# Altium PCB Summits7Beta_PCB2.PcbDoc
Units mm, origin at the board's own origin, x right, y up, seen from the top; angles counter-clockwise.
Board outline 62.5 x 25 mm, 2 copper layers (Top Layer, Bottom Layer), stack 0.871 mm thick; 59 components, 43 nets, 196 pads, 159 vias.
Unrouted connection lines stored in the file: 108.
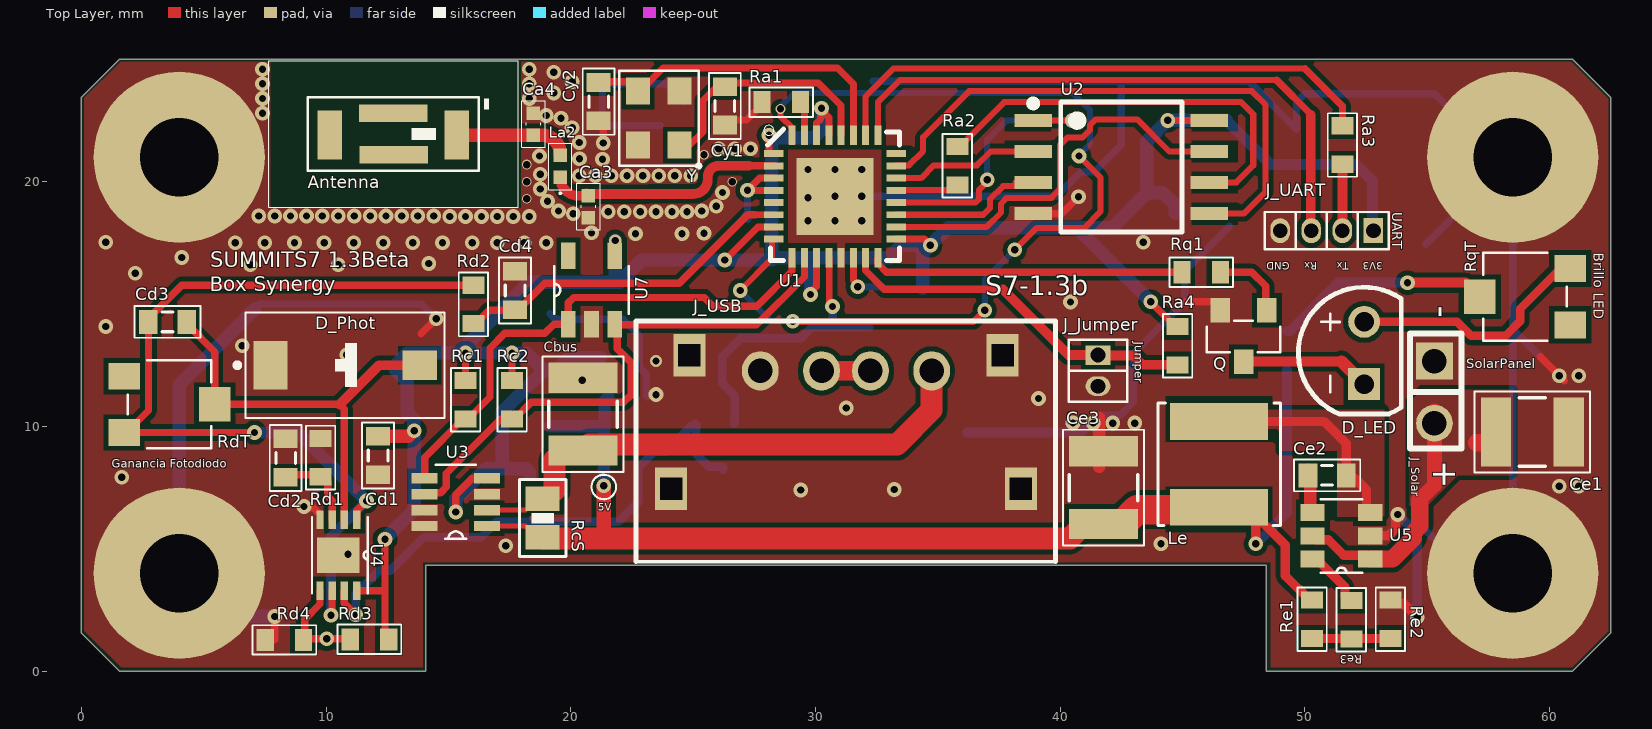
[diagram p0: Top Layer view]
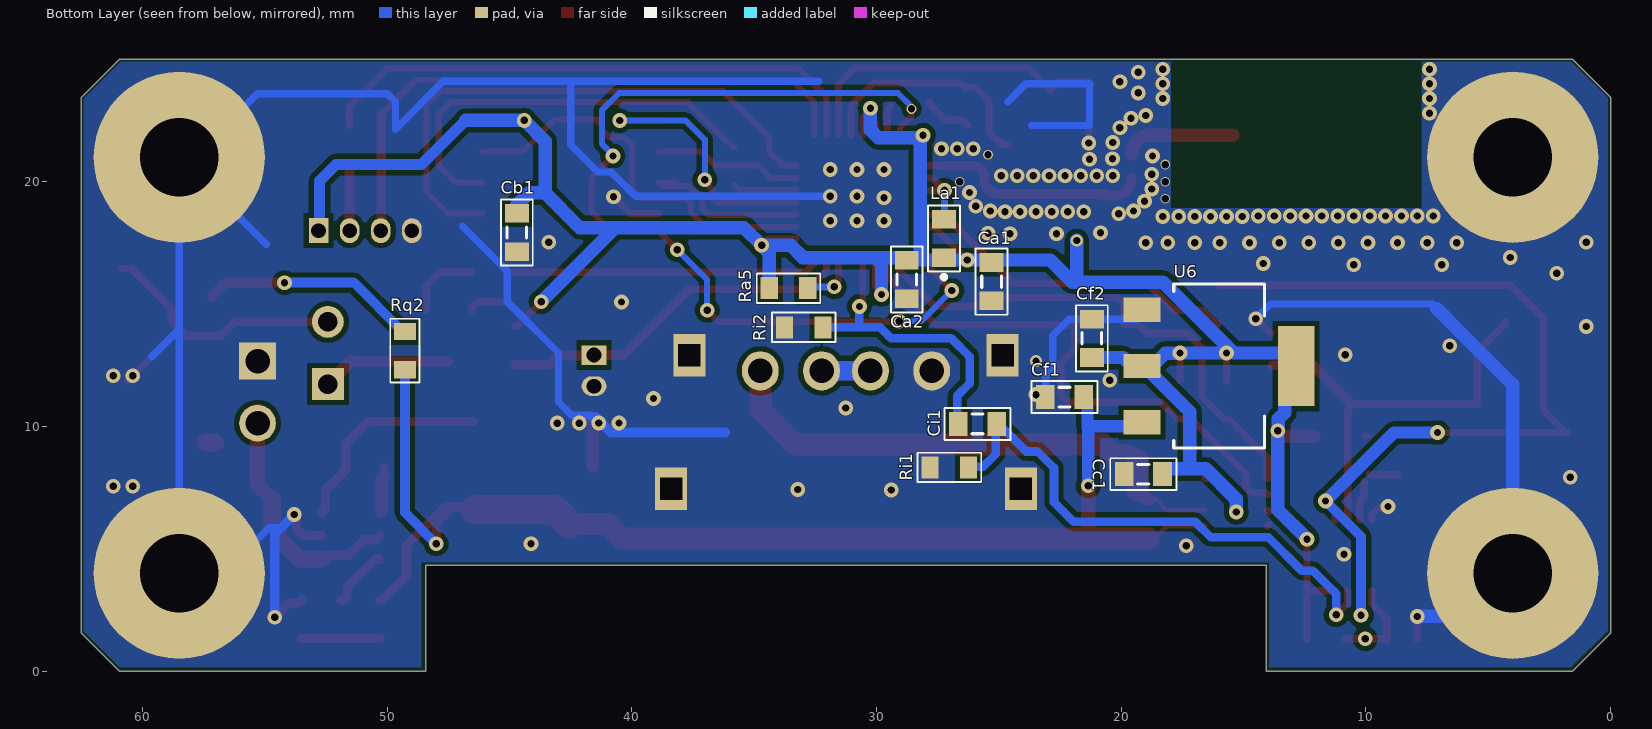
[diagram p1: Bottom Layer view, seen from below]

## Layer stack, top to bottom
Top Solder: solder mask 0.0102, Solder Resist, Dk 3.5
Top Layer: signal copper 0.0356
Dielectric 1: dielectric 0.8, FR-4, Dk 4.8
Bottom Layer: signal copper 0.0356
Bottom Solder: solder mask 0.0102, Solder Resist, Dk 3.5

## Board outline
62.5,1.55 60.95,0 48.425,0 48.425,4.325 14.075,4.325 14.075,0 1.55,0 0,1.55 0,23.45 1.55,25 60.95,25 62.5,23.45

## Design rules (kind name [scope] priority, off if disabled: settings)
Clearance [All] p1: gap=0.2 ignorepadtopadclearanceinfootprint=FALSE
ComponentClearance [All] p1: gap=0.099 collisioncheckmode=3 verticalgap=0.099 showdistances=FALSE
HoleSize [All] p1: absolutevalues=TRUE maxlimit=3.2 minlimit=0.025 maxpercent=80.000 minpercent=20.000
MinimumSolderMaskSliver [All] p1: minsoldermaskwidth=0.045
PlaneConnect [All] p1: planeconnectstyle=Direct reliefexpansion=0.508 reliefentries=4 reliefconductorwidth=0.254 reliefairgap=0.254
PolygonConnect [All] p1: connectstyle=Direct reliefconductorwidth=0.254 reliefentries=4 polygonreliefangle="90 Angle" airgapwidth=0.254
RoutingVias [All] p1: holewidth=0.3 width=0.6 viastyle="Through Hole" minholewidth=0.008 minwidth=0.5 maxholewidth=4 maxwidth=7.1
SilkToSilkClearance [All] p1: silktosilkclearance=0
SilkToSolderMaskClearance [IsPad] p1: minsilkscreentomaskgap=0.099 clearancetoexposedcopper=TRUE
SolderMaskExpansion [All] p1: expansion=0.102
Width [All] p1: maxlimit=1.2 minlimit=0.2 preferedwidth=0.2
24 further rules are at their usual default settings.

## Components (designator, comment, footprint, x,y, rotation, side; value= is the part's Value field where it differs from the comment)
Antenna "AntennaCeramic" ANTENNA_CERAMIC_SUMMITS 12.75,21.95 r0 top
Ca1 "10uF" CAP_0603 25.3,15.914 r270 bottom
Ca2 "100nF" CAP_0603 28.766,16 r270 bottom
Ca3 "3.0pF" CAP_0402 20.725,18.98 r270 top
Ca4 "2.4pF" CAP_0402 18.475,22.35 r90 top
Cb1 "4.7uF" CAP_0603 44.7,17.929 r270 bottom
Cbus "22uF" CAP_1210 20.5,10.5 r90 top
Cc1 "4.7uF" CAP_0603 19.1,8.05 r0 bottom
Cd1 "4.7uF" CAP_0603 12.125,8.813 r270 top
Cd2 "100pF" CAP_0603 8.35,8.713 r90 top
Cd3 "100pF" CAP_0603 3.515,14.27 r180 top
Cd4 "2.2uF" CAP_0603 17.725,15.555 r90 top
Ce1 "22uF" CAP_1210 59.3,9.77 r0 top
Ce2 "1uF" CAP_0603 50.915,8 r0 top
Ce3 "22uF" CAP_1210 41.775,7.499 r90 top
Cf1 "22uF" CAP_0603 22.315,11.2 r0 bottom
Cf2 "22uF" CAP_0603 21.2,13.6 r90 bottom
Ci1 "0.1uF" CAP_0603 25.875,10.1 r0 bottom
Cy1 "22pF" CAP_0603 26.3,23.1 r270 top
Cy2 "22pF" CAP_0603 21.14,23.27 r270 top
D_LED "OVLGC0C6B9" LED 52.425,13 r90 top locked
D_Phot "VBPW34S" BPW34S 10.775,12.5 r180 top locked
J_Jumper "M50-3530242" "JUMPER-1.27 MM" 41.55,12.28 r270 top
J_Solar "Connx2_Panel" PANEL_IN 55.3,11.4 r90 top
J_UART "M50-3530442" UART-1.27MM 50.9,18 r180 top
J_USB "CQ-USB-AFFS90" USB-A__IPX8 27.75,12.27 r0 top
La1 "4.3nH" IND_0603 27.221,17.7 r90 bottom
La2 "2.2nH" IND_0402 19.575,20.629 r90 top
Le "6.8uH 2.3A" INDUCTOR_SRN5040 46.5,8.45 r90 top
Q "ZXT11N20DF" TRANSISTOR_SOT23-3 47.5,13.7 r180 top
Ra1 "12K +- 1%" RES_0603 28.6,23.25 r180 top
Ra2 "200" RES_0603 35.8,20.65 r270 top
Ra3 "499" RES_0603 51.54,21.5 r90 top
Ra4 "1K" RES_0603 44.8,13.3 r270 top
Ra5 "5.6K" RES_0603 33.6,15.65 r180 bottom
Rc1 "10K" RES_0603 15.7,11.085 r270 top
Rc2 "10K" RES_0603 17.6,11.085 r270 top
RcS "0.01 Ohm 0.5W 1%" RES-SHUNT-0805 18.85,6.25 r90 top
Rd1 "1K" RES_0603 9.775,8.725 r270 top
Rd2 "6.8K" RES_0603 16.025,14.985 r90 top
Rd3 "22K" RES_0603 11.775,1.3 r180 top
Rd4 "2.2K" RES_0603 8.3,1.275 r0 top
RdT "R_Trimmer_20K" RES_TRIMMER 3.6,10.9 r270 top
Re1 "43.2K" RES_0603 50.3,2.115 r270 top
Re2 "7.68K" RES_0603 53.5,2.115 r90 top
Re3 "59K" RES_0603 51.9,2.1 r270 top
Ri1 "270" RES_0603 27.025,8.325 r180 bottom
Ri2 "270" RES_0603 32.975,14.05 r180 bottom
Rq1 "1K" RES_0603 45.765,16.3 r180 top
Rq2 "33" RES_0603 49.275,13.1 r90 bottom
RqT "R_Trimmer_1K" RES_TRIMMER 59,15.3 r90 top
U1 "ESP8266EX" ESP8266_QFN32-5X5MM 30.8,19.4 r0 top
U2 "W25Q32JVSSIQ" W25Q32JVSSIQ_SOIC127P790X216-8N 42.5,20.6 r0 top
U3 "INA219BIDCNR" "INA219B SOT23" 15.3,6.9 r180 top
U4 "MCP6002-E/MC" MCP6002-DFN8 10.5,4.738 r270 top
U5 "AP65111AWU-7" AP65111A-SOT23-6 51.5,5.525 r180 top
U6 "LT1117IST-3.3" LT1117IST-3.3_SOT-223 16,12.465 r180 bottom
U7 "EEPROM 128K" 24CW128 20.85,15.575 r90 top
Y "ABM8-26MHz" ABM8-26_OSCSC320X250X100N 23.604,22.6 r180 top

## Footprints (in the part's own frame and the unit in brackets; to place one, negate y for a bottom-side part, rotate by r counter-clockwise, add the part's x,y. Pads: shape width x height; smd on the part's side, far side on the other; paste and mask are expansions set on the pad)
24CW128 [mm] "Footprint EEPROM SOT23"
  rect 1.1x0.6 smd: 1(-1.4,0.95) 2(-1.4,0) 3(-1.4,-0.95) 4(1.4,-0.95) 5(1.4,0.95)
  silkscreen extent -0.97,-1.53 0.97,1.53, body extent -1.25,-1.5 1.25,1.5, height 1.11
ABM8-26_OSCSC320X250X100N [mm] "Crystal de 26MHz"
  rect 0.98x1.1 smd: 1(-0.85,1.1) 2(-0.85,-1.1) 3(0.85,-1.1) 4(0.85,1.1)
  silkscreen extent -1.71,-1.93 1.63,2.04, body extent -1.25,-1.6 1.25,1.6, height 2.63
ANTENNA_CERAMIC_SUMMITS [mm] "PCB CERAMIC ANTENNA"
  rect 1x2 smd: 1(2.6,-0.05) 2(-2.6,-0.05)
  rect 2.8x0.7 smd: 3(0,0.85) 4(0.025,-0.85)
  silkscreen extent -5.1,-3 5.1,3, body extent -2.5,-1 2.5,1, height 2.63
AP65111A-SOT23-6 [mm] "Footprint Buck"
  rect 1x0.7 smd: 1(-1.185,0.95) 2(-1.185,0) 3(-1.185,-0.95) 4(1.185,-0.95) 5(1.185,0) 6(1.185,0.95)
  silkscreen extent -0.85,-1.5 0.85,1.5, body extent -1.4,-1.45 1.4,1.45, height 1.45
BPW34S [mm] "Footprint Fotodiodo"
  rect 1.4x1.2 smd paste-2 mask+0: A(-3.05,0)
  rect 1.4x2 smd paste-2 mask+0: C(3.05,0)
  silkscreen extent -4.06,-2.16 4.5,2.16, body extent -3.2,-1.95 3.2,1.95, height 1.23
CAP_0402 [mm] "Footprint Cap Ceramic 0402"
  rect 0.55x0.55 smd: 1(-0.45,0) 2(0.45,0)
  silkscreen extent -0.95,-0.48 0.95,0.48, body extent -0.5,-0.25 0.5,0.25, height 0.51
CAP_0603 [mm] "Footprint Cap Ceramic 0603"
  rect 0.762x0.976 smd: 1(-0.785,0) 2(0.785,0)
  silkscreen extent -1.35,-0.65 1.35,0.65, body extent -0.8,-0.4 0.8,0.4, height 0.81
CAP_1210 [mm] "Footprint Cap Ceramic 1210"
  rect 1.24x2.81 smd: 1(-1.485,0) 2(1.485,0)
  silkscreen extent -2.36,-1.65 2.36,1.65, body extent -1.6,-1.25 1.6,1.25, height 0.79
ESP8266_QFN32-5X5MM [mm] "Footprint del ESP8266EX"
  rect 0.8x0.285 smd mask+0.065: 1(-2.5,1.75) 2(-2.5,1.25) 3(-2.5,0.75) 4(-2.5,0.25) 5(-2.5,-0.25) 6(-2.5,-0.75) 7(-2.5,-1.25) 8(-2.5,-1.75) 17(2.5,-1.75) 18(2.5,-1.25) 19(2.5,-0.75) 20(2.5,-0.25) 21(2.5,0.25) 22(2.5,0.75) 23(2.5,1.25) 24(2.5,1.75)
  rect 0.285x0.8 smd mask+0.065: 9(-1.75,-2.5) 10(-1.25,-2.5) 11(-0.75,-2.5) 12(-0.25,-2.5) 13(0.25,-2.5) 14(0.75,-2.5) 15(1.25,-2.5) 16(1.75,-2.5) 25(1.75,2.5) 26(1.25,2.5) 27(0.75,2.5) 28(0.25,2.5) 29(-0.25,2.5) 30(-0.75,2.5) 31(-1.25,2.5) 32(-1.75,2.5)
  rect 3.15x3.15 smd paste-3: EP(0,0)
  silkscreen extent -2.9,-2.63 2.63,2.9, body extent -2.5,-2.5 2.5,2.5, height 1.55
"INA219B SOT23" [mm] "Current Monitor"
  rect 1.067x0.42 smd mask+0.09: 1(-1.27,0.975) 2(-1.275,0.325) 3(-1.27,-0.325) 4(-1.27,-0.975) 5(1.27,-0.975) 6(1.27,-0.325) 7(1.27,0.325) 8(1.27,0.975)
  silkscreen extent -0.81,-1.52 0.81,1.5, body extent -1.4,-1.47 1.4,1.47, height 1.2
IND_0402 [mm] "Footprint de Inductor 0402"
  rect 0.55x0.55 smd: 1(-0.45,0) 2(0.45,0)
  silkscreen extent -1.14,-0.48 0.95,0.48, body extent -0.5,-0.3 0.5,0.3, height 0.51
IND_0603 [mm] "Footprint de Inductor 0603"
  rect 0.762x0.976 smd: 1(-0.81,0.025) 2(0.76,0.025)
  silkscreen extent -1.67,-0.63 1.33,0.67, body extent -0.8,-0.45 0.8,0.5, height 0.81
INDUCTOR_SRN5040 [mm] "Inductor_SRN5040"
  rect 1.5x4 smd: 1(-1.75,0) 2(1.75,0)
  silkscreen extent -2.5,-2.5 2.5,2.5, body extent -2.5,-2.5 2.5,2.5, height 4.01
"JUMPER-1.27 MM" [mm] "Footprint Jumper"
  rect 0.8x1.016 hole 0.6: 1(-0.635,0)
  oval 0.8x1.016 hole 0.6: 2(0.635,0)
  silkscreen extent -1.27,-1.2 1.28,1.2, body extent -1.27,-1.2 1.27,1.2, height 4.85
LED [mm] "Led True Hole"
  rect 1.3x1.3 hole 0.8: 1(-1.27,0)
  round 1.3 hole 0.8: 2(1.27,0)
  silkscreen extent -2.5,-1.52 2.69,2.69, body extent -2.5,-2.95 2.95,2.95, height 15.98
LT1117IST-3.3_SOT-223 [mil] "Regulador 3.3V"
  rect 59x39 smd: 1(-124,90.5) 2(-124,0) 3(-124,-90.5)
  rect 59x129 smd: 4(124,0)
  silkscreen extent -73,-132 73,132, body extent -137,-128 137,128, height 67
MCP6002-DFN8 [mm]
  rect 0.75x0.3 smd mask+0.07: 1(-1.45,0.75) 2(-1.45,0.25) 3(-1.45,-0.25) 4(-1.45,-0.75) 5(1.45,-0.75) 6(1.45,-0.25) 7(1.45,0.25) 8(1.45,0.75)
  rect 1.45x1.75 smd paste-3: 9(0,0)
  silkscreen extent -1.55,-1.07 1.55,1.2, body extent -1.55,-1 1.55,1, height 0.81
PANEL_IN [mm] "Footprint Entrada del Panel Solar"
  round 1.5 hole 1: 1(-1.27,0)
  rect 1.5x1.5 hole 1: 2(1.27,0)
  silkscreen extent -2.3,-1.1 2.4,1
RES-SHUNT-0805 [mm] "SHUNT 0805"
  rect 1x1.4 smd: 1(-0.785,0) 2(0.785,0)
  silkscreen extent -1.57,-0.95 1.58,0.95, body extent -0.99,-0.66 1.03,0.61, height 0.63
RES_0603 [mm] "Footprint Resistor 0603"
  rect 0.7x0.9 smd: 1(-0.785,0) 2(0.785,0)
  silkscreen extent -1.3,-0.6 1.3,0.6, body extent -0.8,-0.4 0.8,0.4, height 0.46
RES_TRIMMER [mm] "Trimmer"
  rect 1.1x1.3 smd: 1(-1.15,-1.85) 3(1.15,-1.85)
  rect 1.4x1.3 smd: 2(0,1.85)
  silkscreen extent -1.8,-1.7 1.8,1.7, body extent -1.7,-1.8 1.7,1.8, height 2
TRANSISTOR_SOT23-3 [mm] "Transistor NPN"
  rect 0.8x1 smd: B(-0.95,-1.05) C(0,1.05) E(0.95,-1.05)
  silkscreen extent -1.5,-0.63 1.5,0.67, body extent -1.5,-1.25 1.5,1.25, height 1.11
UART-1.27MM [mm] "Socket UART"
  rect 0.8x1.016 hole 0.6: 1(-1.905,0)
  oval 0.8x1.016 hole 0.6: 2(-0.635,0) 3(0.635,0) 4(1.905,0)
  silkscreen extent -2.54,-0.76 2.54,0.76, body extent -2.54,-1.2 2.54,1.2, height 4.85
USB-A__IPX8 [mm] "Footprint del USB tipo A"
  rect 1.3x1.75 hole 0.9 square: 0(-3.65,-4.82) 0(-2.9,0.64) 0(9.9,0.64) 0(10.65,-4.82)
  oval 1.5x1.6 hole 1: 1(7,0) 2(4.5,0) 3(2.5,0) 4(0,0)
  silkscreen extent -5.08,-7.8 12.06,2.03, body extent -4.15,-10.95 11.15,1.2, height 7.46
W25Q32JVSSIQ_SOIC127P790X216-8N [mil] "Memoria Flash SOIC8 SS"
  rect 60x21 smd: 1(-141.73,75) 2(-141.73,25) 3(-141.73,-25) 4(-141.73,-75) 5(141.73,-75) 6(141.73,-25) 7(141.73,25) 8(141.73,75)
  silkscreen extent -151,-104 97,111, body extent -161,-106 161,106, height 85

## Part data
Antenna: "Antena de Cerámica", Supplier Part Number 1=609-2450AT42B100E, Supplier 1=Mouser
Ca1 Ca2 Cb1 Cc1 Cd1 Cd2 Cd3 Cd4 Ce2 Cf1 Cf2 Ci1 Cy1 Cy2: library part Cap_0603_Ceramic, "Capac Ceramic SMD"
Ca3 Ca4: library part Cap_0402, "Capac Ceramic SMD"
Cbus Ce1 Ce3: library part Cap_1210_Ceramic, "Capac Ceramic SMD"
D_LED: "LED Green-Blue 505nm", Package="0603 Broadcom", Supplier Part Number 1=828-OVLGC0C6B9, Availability=Unavailable, MF="Broadcom Limited", MP=HSMW-C191, Price=None, SnapEDA_Link=https://www.snapeda.com/parts/HSMW-C191/Broadcom%20Limited/view-part/1840124/?ref=snap, Supplier 1=Mouser
D_Phot: "Photodiode 850nm 25ns 120° 2-SMD, Gull Wing", Package="SMD-2 Osram Opto", Supplier Part Number 1=782-VBPW34S, Availability=Unavailable, MF="OSRAM Opto", MP="BPW 34 BS-Z", Price=None, SnapEDA_Link=https://www.snapeda.com/parts/BPW%2034%20BS-Z/OSRAM%20Opto%20Semiconductors%20Inc./view-part/392328/?ref=snap, Supplier 1=Mouser
J_Jumper: library part Jumper, "1.27mm Pin Header 2x1", Supplier Part Number 1=855-M50-3530242, Supplier 1=Mouser
J_Solar: "Conector del Panel"
J_UART: library part Connx4_UART, "1.27mm Pin Header 4x1", Supplier Part Number 1=855-M50-3530442, Supplier 1=Mouser
J_USB: library part "USB-A 5V", "Conector del USB   --   CQ-USB-AFFS90"
La1: library part Ind_0603, "Inductor SMD 0603", Package="0603 Murata", Availability=Unavailable, MF=Murata, MP=LQP03TN62NHZ2D, Price=None, SnapEDA_Link=https://www.snapeda.com/parts/LQP03TN62NHZ2D/Murata/view-part/4472751/?ref=snap
La2: library part Ind_0402, "Inductor SMD 0402", Package="0603 Murata", Availability=Unavailable, MF=Murata, MP=LQP03TN62NHZ2D, Price=None, SnapEDA_Link=https://www.snapeda.com/parts/LQP03TN62NHZ2D/Murata/view-part/4472751/?ref=snap
Le: library part Ind_SRN5040, "Inductor_SRN5040", Package="Nonstandard Vishay Dale", Supplier Part Number 1=652-SRN5040-6R8M, Availability=Unavailable, MF="Vishay Dale", Price=None, SnapEDA_Link=https://www.snapeda.com/parts/IHLP-2525CZ-01/Vishay%20Dale/view-part/561997/?ref=snap, Supplier 1=Mouser
Q: "Transistor NPN Low Saturation Vce", Supplier Part Number 1=522-ZXT11N20DFTA, Supplier 1=Mouser
Ra1 Ra2 Ra3 Ra4 Ra5 Rc1 Rc2 Rd1 Rd2 Rd3 Rd4 Re1 Re2 Re3 Ri1 Ri2 Rq1 Rq2: library part Res_0603, "Resistor SMD", LatestRevisionDate=17-Jul-2002, LatestRevisionNote="Re-released for DXP Platform.", PackageDescription="Axial Device, Thru-Hole; 2 Leads; 0.3 in Pin Spacing", PackageReference=AXIAL-0.3, Published=8-Jun-2000, Publisher="Altium Limited"
RcS: library part Shunt_0805, "Shunt", Supplier Part Number 1=667-ERJ-6BWFR010V, LatestRevisionDate=17-Jul-2002, LatestRevisionNote="Re-released for DXP Platform.", PackageDescription="Axial Device, Thru-Hole; 2 Leads; 0.3 in Pin Spacing", PackageReference=AXIAL-0.3, Published=8-Jun-2000, Publisher="Altium Limited", Supplier 1=Mouser
RdT: library part R_Trimmer_20k, "Trimmer Resistor SMD 20kohm", Supplier Part Number 1=81-PVG3A203C01R00, LatestRevisionDate=17-Jul-2002, LatestRevisionNote="Re-released for DXP Platform.", PackageDescription="Axial Device, Thru-Hole; 2 Leads; 0.3 in Pin Spacing", PackageReference=AXIAL-0.3, Published=8-Jun-2000, Publisher="Altium Limited", Supplier 1=Mouser
RqT: library part R_Trimmer_1k, "Trimmer Resistor SMD 1kohm", Supplier Part Number 1=81-PVG3A102C01R00, LatestRevisionDate=17-Jul-2002, LatestRevisionNote="Re-released for DXP Platform.", PackageDescription="Axial Device, Thru-Hole; 2 Leads; 0.3 in Pin Spacing", PackageReference=AXIAL-0.3, Published=8-Jun-2000, Publisher="Altium Limited", Supplier 1=Mouser
U1: "Microcontrolador ESP8266", Package="VFQFN-32 Espressif Systems", Supplier Part Number 1=356-ESP8266EX, Availability=Unavailable, MF="Espressif Systems", MP=ESP8266, Price=None, SnapEDA_Link=https://www.snapeda.com/parts/ESP8266/Espressif%20Systems/view-part/106411/?ref=snap, Supplier 1=Mouser
U2: "FLASH - NOR Memory IC 32Mb _4M x 8_ SPI - Quad I/O 133MHz 8-SOIC", Package="SOIC-8 Winbond", Availability=Unavailable, MF=Winbond, MP=W25Q32JVSSIQ, Price=None, SnapEDA_Link=https://www.snapeda.com/parts/W25Q32JVSSIQ/Winbond%20Electronics/view-part/596953/?ref=snap
U3: "Current Monitor Regulator High-Side 10mA SOT-23-8", Package="SOT-23 Texas Instruments", Supplier Part Number 1=595-INA219BIDCNR, Digi-Key_Part_Number=296-46420-1-ND, Digi-Key_Purchase_URL=https://www.digikey.com.au/product-detail/en/texas-instruments/INA219BIDCNR/296-46420-1-ND/7033594?utm_source=snapeda&utm_medium=aggregator&utm_campaign=symbol, MF="Texas Instruments", MP=INA219BIDCNR, SnapEDA_Link=https://www.snapeda.com/parts/INA219BIDCNR/Texas%20Instruments/view-part/870494/?ref=snap, Supplier 1=Mouser
U4: "Double OP AMP - 1.8V 1MHz  Single Supply", Supplier Part Number 1=579-MCP6002-E/MC, Supplier 1=Mouser
U5: "Buck Switching Regulator IC Positive Adjustable 0.8V 1 Output 1.5A SOT-23-6 Thin, TSOT-23-6", Package="TSOT-23-6 Diodes Inc.", Supplier Part Number 1=621-AP65111AWU-7, Availability=Unavailable, MF="Diodes Inc.", MP=AP65111AWU-7, Price=None, SnapEDA_Link=https://www.snapeda.com/parts/AP65111AWU-7/Diodes%20Inc./view-part/1631258/?ref=snap, Supplier 1=Mouser
U6: "LDO Regulator Pos 3.3V 0.8A Automotive 4-Pin_3+Tab_ SOT-223 Tube", Package="SOT-223-3 Analog Devices", Supplier Part Number 1=584-LT1117CST-3.3PBF, Availability=Unavailable, MF="Analog Devices", MP=LT1117IST-5#PBF, Price=None, SnapEDA_Link=https://www.snapeda.com/parts/LT1117IST-5%23PBF/Analog%20Devices/view-part/4348177/?ref=snap, Supplier 1=Mouser
U7: library part 24CW1280T-I/OT, Supplier Part Number 1=579-24CW1280T-I/OT, Supplier 1=Mouser
Y: "26MHz ±10ppm Crystal 10pF 50 Ohms 4-SMD, No Lead", Package="SMD-4 Abracon", Supplier Part Number 1=815-ABM8-26-T, Digi-Key_Part_Number=300-8230-1-ND, Digi-Key_Purchase_URL=https://www.digikey.com/product-detail/en/abracon-llc/ABM8-26.000MHZ-10-1-U-T/300-8230-1-ND/687923?utm_source=snapeda&utm_medium=aggregator&utm_campaign=symbol, MF=Abracon, MP=ABM8-26.000MHZ-10-1-U-T, SnapEDA_Link=https://www.snapeda.com/parts/ABM8-26.000MHZ-10-1-U-T/Abracon%20LLC/view-part/356267/?ref=snap, Supplier 1=Mouser

## Free pads (board coordinates)
  round 7 hole 3.2: H(4,4) H(4,21) H(58.5,4) H(58.5,21)

## Via types
v1: diameter 0.6, hole 0.3, Top Layer to Bottom Layer, tented both sides, 149 vias
v2: diameter 0.4, hole 0.3, Top Layer to Bottom Layer, tented both sides, 6 vias
v3: diameter 0.5, hole 0.3, Top Layer to Bottom Layer, tented both sides, 2 vias
v4: diameter 0.6, hole 0.3, Top Layer to Bottom Layer, tented bottom, 2 vias

## Nets (pads, with @x,y where several pads share a name; then routed paths per layer and width w, separated by ;. In a path a pad name is that pad's centre, name@x,y a point inside that pad or via, vN(x,y) a via of type N, cw(c..) or ccw(c..) an arc to the next point about the centre after c; other vN are vias at no path point)
3.3uC: La1.2 U1.3 U1.4 | length 3.7
  Top Layer w0.285: U1.4 v1(27.225,19.65) 27.724,20.15 U1.3
  Bottom Layer w0.285: v1(27.225,19.65) 27.225,18.731 27.1,18.606 La1.2
3.3V: Ca1.1 Ca2.1 Cb1.1 Cc1.1 Cd1.1 Cf2.1 J_UART.1 La1.1 Ra4.1 Ra5.1 Rc1.1 Rc2.1 Rd3.1 U1.1 U1.7 U1.11 U1.17 U1.29 U1.30 U2.8 U3.4 U4.8 U6.2 U6.4 U7.4 | length 114.2
  Top Layer w0.285: v1(26.3,16.8) 27.65,18.15 U1.7 ; v1(28.1,21.9) 28.1,21.15 U1.1 ; v1(29.8,15.392) 29.8,15.477 30.05,15.727 U1.11 ; U1.30 30.05,22.4 30.2,22.55 v1@30.2,22.869 ; v1(30.25,23) 30.25,22.919 30.25,22.915 30.542,22.622 30.55,22.615 U1.29 ; U1.17 34.45,17.65 v1(34.7,17.4) ; v1(44.4,22.505) U2.8
  Top Layer w0.3: U4.8 12.397,3.288 ; Rd3.1@12.409,1.3 v1(12.409,5.391) ; v1(15.3,6.5) 15.3,7.2 15.975,7.875 U3.4 ; Rc1.1 v1(15.7,13) ; Rc2.1 v1(17.6,13) ; v1@30.25,22.919 30.542,22.627 30.542,22.622 ; v1(43.7,15.1) 43.7,15.085 44.7,14.085 Ra4.1
  Top Layer w0.55: Cd1.1 13.373,9.598 v1(13.6,9.825)
  Bottom Layer w0.45: 46.798,22.505 48.603,20.7 52.1,20.7 52.766,20.034 J_UART.1@52.766,17.925
  Bottom Layer w0.55: v1(12.409,5.391) 12.409,5.409 13.6,6.6 v1(13.6,9.825) ; v1@13.575,9.8 13.575,10.31 13.325,10.56 13.325,11.826 12.85,12.3 12.85,12.526 13.325,13 15.4,13 18.3,15.9 22,15.9 ; v1(15.3,6.5) 15.31,6.51 15.31,7.035 16.538,8.263 18.184,8.263 18.315,8.132 Cc1.1 ; v1(15.7,13) v1(17.6,13) 17.61,12.99 18.205,12.99 U6.2@18.896,12.3 ; 17.2,8.4 17.2,10.604 U6.2@18.896,12.3 ; U6.2@19.15,12.3 U6.2@18.896,12.3 ; U6.2@19.404,12.3 19.919,12.815 Cf2.1 ; v3(21.819,17.6) 21.819,16.081 22,15.9 ; v1(29.8,15.392) 29.8,16.642 30.058,16.9 ; v1(30.25,23) 30.25,22.122 29.928,21.8 28.11,21.8 28.21,21.7 28.21,16.81 ; Ra5.1 34.385,17.071 34.7,17.386 v1(34.7,17.4) ; v1(43.7,15.1) 40.675,18.125 ; Cb1.1 44.7,19.05 44.2,19.55 43.55,19.55 ; 46.798,22.505 v1(44.4,22.505) 43.55,21.655 43.55,19.55 ; 22,15.9 22.9,16.8 v1(26.3,16.8) 28.2,16.8 28.21,16.81 ; 28.21,16.81 28.3,16.9 30.058,16.9 ; 30.058,16.9 33.009,16.9 33.509,17.4 v1(34.7,17.4) ; v1(34.7,17.4) 35.425,18.125 40.675,18.125 ; 40.675,18.125 42.125,18.125 43.55,19.55
5V: Ce3.1 Cf1.1 Le.1 RcS.1 Re1.1 Rq2.1 U3.1 U6.3 | length 54.3
  Top Layer w0.2: U3.1 18.145,5.925 18.605,5.465 RcS.1
  Top Layer w0.381: Le.1@47.35,6.7 47.65,6.7 49.2,5.15 49.2,3.9 50.2,2.9 Re1.1
  Top Layer w0.4: Le.1 47.35,6.7 48,6.05 v1(48,5.2)
  Top Layer w0.6: RcS.1 RcS.1@18.895,5.42 ; 21.3,5.425 21.3,5.45 21.348,5.498 v4(21.348,7.575)
  Top Layer w0.9: RcS.1@18.895,5.42 40.396,5.42 40.99,6.014 Ce3.1 Ce3.1@42.56,6.014 ; Le.1@46.4,6.6 Le.1
  Top Layer w1.2: Ce3.1@42.56,6.014 43.146,6.6 Le.1@46.4,6.6
  Bottom Layer w0.4: v1(48,5.2) 49.275,6.475 Rq2.1
  Bottom Layer w0.5: U6.3@19.15,10.001 21.278,10.001 21.348,9.932 ; v4(21.348,7.575) 21.348,9.932 ; Cf1.1 21.378,11.048 21.378,9.962 21.348,9.932
A-Colector: D_LED.1 Q.C | length 5.3
  Top Layer w0.4: Q.C 51.505,12.65
  Top Layer w0.5: 51.505,12.65 D_LED.1
ADCin: Cd4.1 Rd2.1 U1.6 | length 14.1
  Top Layer w0.285: 27.55,18.65 U1.6
  Top Layer w0.3: Rd2.1 16.125,14.2 16.675,14.75 17.705,14.75 Cd4.1 17.857,14.77 18.938,15.85 24.431,15.85 27.231,18.65 27.55,18.65
AO_out: Cd3.2 Rd2.2 RdT.3 U4.1 U4.6 | length 37.1
  Top Layer w0.285: RdT.3 RdT.3@1.85,9.75 ; Cd3.2 2.743,14.257 2.743,10.643 RdT.3@1.85,9.75 ; v1(7.075,9.75) RdT.3@1.85,9.75 ; v1(10.2,2.275) 10.243,2.318 10.243,3.28 U4.6
  Top Layer w0.3: Cd3.2 2.73,14.402 4.098,15.77 Rd2.2 ; U4.1 11.25,6.55 v1(11.65,6.95)
  Bottom Layer w0.4: v1@10.2,2.375 10.2,5.5 v1(11.65,6.95)
  Bottom Layer w0.5: v1(7.075,9.75) 8.85,9.75 v1(11.65,6.95)
Base: Q.B Rq1.1 | length 3.1
  Top Layer w0.3: Rq1.1 47.835,16.3 48.4,15.735 48.4,14.8 Q.B
BST1: Ce2.1 U5.4 | length 1.9
  Top Layer w0.381: Ce2.1 Ce2.1@50.13,8.3 ; U5.4@50.223,6.568 U5.4
  Top Layer w0.5: Ce2.1 50.223,7.908 U5.4@50.223,6.568
BST2: Ce2.2 Le.2 U5.3 | length 8.8
  Top Layer w0.381: Le.2 50.8,10.2 51.7,9.3 51.7,8.3 51.7,8.218 52.522,7.397 52.522,6.635 52.681,6.475 U5.3
CLK_MEM: Ra2.1 U2.6 | length 17.2
  Top Layer w0.25: Ra2.1 35.9,21.435 37.715,23.25 47.4,23.25 47.895,22.755 47.895,20.667 47.2,19.972 46.107,19.972 U2.6
CS_MEM: U1.20 U2.1 | length 11.7
  Top Layer w0.25: U1.20 36.55,19.15 36.684,19.284 36.684,19.656 37.019,19.991 v1(37.019,20.086) ; U2.1@39.167,22.505 U2.1 38.902,22.503 40.498,22.503 v1(40.5,22.5)
  Bottom Layer w0.25: v1(37.019,20.086) 37.019,21.715 37.804,22.5 v1(40.5,22.5)
DI_MEM: U1.23 U2.5 | length 23.2
  Top Layer w0.25: U1.23 33.317,20.667 33.819,20.667 34.4,21.248 34.4,21.815 36.285,23.7 47.84,23.7 48.4,23.14 48.4,19.584 47.511,18.695 U2.5
DIV_INT: Rd3.2 Rd4.2 U4.5 | length 4.1
  Top Layer w0.3: U4.5 9.75,2.744 9.13,2.125 9.13,1.23 9.216,1.315 9.9,1.315 10.774,1.315 10.814,1.275 Rd3.2@10.839,1.3
  other v4: 10.025,1.315
DivisorFB: Re1.2 Re2.1 Re3.2 | length 3.2
  Top Layer w0.381: Re1.2 Re2.1
DO_MEM: U1.22 U2.2 | length 6
  Top Layer w0.25: U1.22 34.318,20.15 34.835,20.667 36.602,20.667 37.169,21.235 U2.2
FB: Re3.1 U5.6 | length 2.5
  Top Layer w0.381: U5.6 50.49,4.575 51.64,3.425 51.64,3.044 51.8,2.885 Re3.1
GND: Ca1.2 Ca2.2 Ca3.2 Ca4.2 Cb1.2 Cbus.2 Cc1.2 Cd1.2 Cd2.2 Cd4.2 Ce1.2 Ce3.2 Cf1.2 Cf2.2 Cy1.2 Cy2.2 D_Phot.C J_Jumper.2 J_Solar.2 J_UART.4 J_USB.0 J_USB.4 pad.H Q.E Ra1.2 Rd1.1 Rd4.1 Re2.2 Ri1.1 Ri2.1 U1.13 U1.EP U2.4 U3.3 U3.7 U3.8 U4.4 U4.9 U5.2 U6.1 U7.2 Y.2 Y.4 | length 147.8
  Top Layer w0.285: Cd4.2 Cd4.2@17.75,16.365
  Top Layer w0.3: 7.89,1.275 7.908,1.293 v1(7.908,2.232) ; v1(9.1,6.725) 9.157,6.668 9.495,6.668 9.75,6.413 U4.4 ; Rd1.1@9.95,9.61 Rd1.1@10.05,9.61 ; 13.88,13.782 v1(14.5,14.402) ; U3.8@13.97,5.985 U3.8 ; U3.7@13.97,6.515 U3.7 ; Cy2.2@21.286,22.485 21.325,22.446 v1(21.325,21.579) ; Cy1.2 26.506,22.521 27.186,22.521 27.815,23.15 Ra1.2 ; U2.4@38.905,18.7 U2.4 40.06,18.695 v1(40.75,19.385) ; 45.1,15.1 46.3,15.1 46.55,14.85 Q.E ; 59.623,12.847 v1@60.6,11.87
  Top Layer w0.381: U5.2 53.4,5.525 53.709,5.834 53.709,6.309 v1(53.8,6.4) ; Re2.2 53.616,2.784 54.016,2.784 v1(54.6,2.2)
  Top Layer w0.5: 41.6,8.335 41.6,8.858 41.6,10.365
  Bottom Layer w0.3: 7.098,14.812 7.286,15 13.902,15 v1(14.5,14.402) ; U6.1@19.15,14.599 19.363,14.385 Cf2.2 22.129,14.385 22.8,13.714 22.8,12.419 23.081,12.138 23.081,11.219 Cf1.2 ; 23.665,22.3 21.3,22.3 21.3,24 23.898,24 24.637,23.26 ; v1(31.9,19.4) 39.845,19.4 40.845,20.4 41.4,20.4 42.5,21.5 42.5,24.1 ; 32.37,24.1 42.5,24.1 ; 41.6,10.365 41.696,10.461 42.461,10.461 43,11 43,13 45.1,15.1 45.1,16.354 46.926,18.179 ; 54.33,5.87 54.817,5.87 56.687,4 58.5,4 58.5,13.97 ; 54.942,17.442 pad.H@58.5,21 ; 59.623,12.847 58.5,13.97 ; 42.5,24.1 47.711,24.1 49.66,22.151 49.66,23.26 50,23.6 55.3,23.6 57.9,21 pad.H@58.5,21 ; 58.5,13.97 pad.H@58.5,21
  Bottom Layer w0.381: v1(53.8,6.4) 54.33,5.87 54.6,5.6 v1(54.6,2.2)
  Bottom Layer w0.4: 36.2,9.75 39.167,9.75 40.85,9.75 41.465,10.365 41.6,10.365
  Bottom Layer w0.55: 7.098,14.812 6.7,14.414 6.7,14.4 4,11.7 4,4 5.116,4 6.884,2.232 v1(7.908,2.232)
  other v1: 10.9,4.775 17.35,5.125 44.125,5.2 29.4,7.4 33.225,7.421 60.4,7.55 61.2,7.55 1.65,7.925 42.15,10.135 43.05,10.135 40.53,10.137 41.35,10.137 31.254,10.75 39.117,11.137 23.487,11.3 20.475,11.888 60.4,12.07 61.2,12.07 10.845,12.925 6.575,13.3 1,14.085 40.425,15.085 2.2,16.263 6.9,16.605 10.5,16.6 14.2,16.658 4.1,16.9 6.29,17.5 7.5,17.5 8.71,17.5 9.92,17.5 11.129,17.5 12.339,17.5 13.549,17.5 14.759,17.5 15.969,17.5 17,17.5 18.103,17.5 19.005,17.5 1,17.527 43.4,17.527 22.65,17.875 24.55,17.869 25.444,17.9 20.85,17.916 29.7,18.4 30.8,18.4 31.9,18.4 15.05,18.575 15.7,18.575 16.35,18.575 17,18.575 17.65,18.575 18.3,18.575 7.25,18.6 7.9,18.6 8.55,18.6 9.2,18.6 9.85,18.6 10.5,18.6 11.15,18.6 11.8,18.6 12.45,18.6 13.1,18.6 13.75,18.6 14.4,18.6 20.1,18.695 21.537,18.775 22.187,18.775 22.837,18.775 23.487,18.775 24.137,18.775 24.75,18.775 19.5,18.8 25.35,18.8 25.95,19 19.05,19.2 29.7,19.35 30.8,19.4 26.2,19.56 18.752,19.7 20.35,20.242 21,20.242 21.65,20.242 22.3,20.242 22.95,20.242 23.6,20.242 24.25,20.242 24.9,20.242 18.75,20.3 29.7,20.5 30.8,20.5 31.9,20.5 21.3,20.922 20.355,20.942 18.725,21.05 26.05,21.35 26.7,21.35 27.35,21.35 20.35,21.6 20.055,22.2 19.605,22.6 19.005,22.705 7.4,22.8 7.4,23.4 18.3,23.4 19.3,23.629 7.4,24 18.3,24 20.055,24.079 19.3,24.479 7.4,24.6 18.3,24.6
  other v2: 18.205,19.3 18.205,20 26.6,20 18.205,20.7 25.444,21.1
  other v3: 23.487,12.67
GPIO2: Ra5.2 U1.14 | length 2.4
  Top Layer w0.25: v1(31.725,15.701) v1@31.725,15.795
  Top Layer w0.285: U1.14 31.55,15.97 v1@31.725,15.795
  Bottom Layer w0.285: v1(31.725,15.701) 32.764,15.701 Ra5.2
HOLD_MEM: U1.18 U2.7 | length 16.6
  Top Layer w0.25: U1.18 36.997,18.15 37.584,18.737 37.584,19.096 37.825,19.337 39.637,19.337 39.993,19.693 39.993,21.494 40.299,21.8 40.908,21.8 41.225,22.117 41.225,22.325 41.45,22.55 43.15,22.55 44.465,21.235 U2.7
IN+: Cd2.1 Rd1.2 U4.3 | length 2.8
  Top Layer w0.3: Cd2.1@8.7,8.028 8.706,8.021 9.831,8.021 Rd1.2@9.85,8.04 ; Rd1.2@10.075,7.74 10.075,7.14 10.25,6.965 U4.3
Interrupt_IN: Ci1.1 Ri1.2 U4.7 | length 22.1
  Top Layer w0.3: U4.7 10.75,2.768 v1(11.218,2.3)
  Bottom Layer w0.35: v1(11.218,2.3) 11.218,3.15 12.168,4.1 12.625,4.1 14,5.475 16.35,5.475 16.975,6.1 21.95,6.1 22.75,6.9 22.75,8.3 23.425,8.975 23.887,8.975 Ci1.1@24.962,10.05 ; Ci1.1 25.125,10.065 25.125,8.875 25.65,8.35 26.215,8.35 Ri1.2 Ri1.2@26.24,8.225
Interrupt_OUT: Ci1.2 Ri2.2 U1.12 | length 12.4
  Top Layer w0.285: U1.12 30.565,16.885 30.565,15.037 v1(30.701,14.901)
  Bottom Layer w0.35: Ci1.2 26.7,10.14 26.7,11.25 26.2,11.75 26.2,12.853 26.947,13.6 29.409,13.6 29.859,14.05 30.701,14.05 ; v1(30.701,14.901) 30.701,14.05 ; Ri2.2 30.701,14.05
JUMPER: J_Jumper.1 Ra4.2 U1.15 | length 14.9
  Top Layer w0.285: U1.15 32.05,16.363 32.813,15.6
  Top Layer w0.3: 32.813,15.6 37.662,15.6
  Top Layer w0.4: 37.662,15.6 40.347,12.915 J_Jumper.1 41.573,12.892 42.998,12.892 43.375,12.515 Ra4.2
K-Colector: D_LED.2 RqT.3 | length 10.3
  Top Layer w0.3: D_LED.2@52.27,14.425 D_LED.2 ; RqT.3@60.45,16.45 RqT.3
  Top Layer w0.35: D_LED.2 56.23,14.27 56.8,13.7 58.2,13.7 58.8,14.3 58.8,14.8 RqT.3@60.45,16.45
LED: Rq1.2 U1.16 | length 12.8
  Top Layer w0.285: U1.16@32.55,16.658 32.908,16.3
  Top Layer w0.3: U1.16@32.55,16.658 U1.16 ; 32.908,16.3 Rq1.2
NetAntenna_1: Antenna.1 Ca4.1 La2.2 | length 4.6
  Top Layer w0.55: Antenna.1@15.44,21.9 Ca4.1 18.82,21.9 cw(c18.82,21.15) La2.2@19.57,21.15
NetR220: Ra2.2 U1.21 | length 2.6
  Top Layer w0.25: U1.21 33.317,19.667 35.602,19.667 Ra2.2
NetR500: Ra3.2 U1.26 | length 23
  Top Layer w0.25: U1.26 32.05,23.49 33.185,24.625 49.985,24.625 50.01,24.6
  Top Layer w0.3: 50.01,24.61 51.54,23.079 Ra3.2
NetRq2_2: Rq2.2 RqT.2 | length 9
  Top Layer w0.4: v1(54.2,15.875) 56.575,15.875 56.65,15.8 56.7,15.8 57.15,15.35 RqT.2
  Bottom Layer w0.4: Rq2.2 49.375,13.885 51.365,15.875 v1(54.2,15.875) v1@54.238,15.837
OTG: J_USB.2 J_USB.3 | length 4
  Top Layer w0.8: J_USB.3 J_USB.2
  Bottom Layer w0.8: J_USB.3 J_USB.2
Photodiode/IN-: Cd3.1 D_Phot.A RdT.2 U4.2 | length 17.7
  Top Layer w0.3: Cd3.1 4.3,14.188 5.45,13.038 RdT.2 10.559,10.9 10.75,10.709 U4.2
  Top Layer w0.4: 10.559,10.9 12.159,12.5 D_Phot.A
R12k: Ra1.1 U1.31 | length 1.3
  Top Layer w0.285: Ra1.1@29.45,23.125 29.45,23.04 29.55,22.94 U1.31
SCL: Rc1.2 U1.9 U3.5 U7.1 | length 21.6
  Top Layer w0.285: 27.603,14.903 29.05,16.35 U1.9@29.05,16.9
  Top Layer w0.3: U3.5 14.03,8.73 15.6,10.3 Rc1.2 15.8,10.3 16.7,11.2 16.7,13.2 17.3,13.8 18.942,13.8 19.317,14.175 U7.1 19.9,14.525 19.9,15.05 20.12,15.27 25.45,15.27 25.817,14.903 27.603,14.903
SDA: Rc2.2 U1.10 U3.6 U7.3 | length 23
  Top Layer w0.285: 27.593,14.155 29.55,16.111 U1.10
  Top Layer w0.3: U3.6 14.09,7.285 14.678,7.285 14.678,7.315 14.708,7.315 14.913,7.52 14.913,8.076 17.137,10.3 Rc2.2 17.7,10.3 18.383,10.983 22.158,10.983 22.475,11.3 22.475,12.6 21.9,13.175 21.9,14.075 U7.3@21.82,14.155 ; U7.3 U7.3@21.82,14.155 ; 27.593,14.155 U7.3@21.82,14.155
Sleep: U1.8 U1.32 | length 39.8
  Top Layer w0.25: v1@26.925,15.55 v1(26.925,15.553) 28.225,16.853 28.225,17.633 28.242,17.65 U1.8 ; v2(28.571,22.975) 28.571,22.675 29.05,22.196 U1.32 ; v1(29.075,14.3) 29.099,14.276 36.451,14.276 v1(36.925,14.75) ; v1(38.15,17.225) 39.028,18.103 40.978,18.103 41.65,18.775 41.65,20.175 v1(40.775,21.05)
  Bottom Layer w0.25: v1(26.925,15.553) 28.178,14.3 v1(29.075,14.3) ; v2(28.571,22.975) 28.571,23.07 29.126,23.625 40.525,23.625 41.225,22.925 41.225,21.555 40.775,21.105 v1(40.775,21.05) ; v1(36.925,14.75) 36.925,16 v1(38.15,17.225)
U0RXD: J_UART.3 U1.25 | length 24.7
  Top Layer w0.25: U1.25 32.55,23.25 33.45,24.15 48.85,24.15
  Top Layer w0.3: 48.85,24.15 50.274,22.726
  Top Layer w0.4: J_UART.3@50.248,18.1 50.248,22.726
U0TXD: J_UART.2 Ra3.1 | length 2.7
  Top Layer w0.4: J_UART.2@51.54,18.023 Ra3.1
UC/Inductor: Ca3.1 La2.1 U1.2 | length 9.9
  Top Layer w0.3: 27.3,20.65 U1.2
  Top Layer w0.4: La2.1 19.575,20.153 ccw(c20.298,20.153) 20.298,19.43 Ca3.1 20.725,19.455 Ca3.1@20.65,19.53 ; Ca3.1@20.725,19.495 23.195,19.495 23.2,19.5 25.005,19.5 ccw(c25.005,20.095) 25.6,20.095 ; 25.6,20.2 cw(c26.05,20.2) 26.05,20.65 27.3,20.65
V_Bus: Cbus.1 J_USB.1 RcS.2 U3.2 | length 22.2
  Top Layer w0.2: U3.2 17.75,6.575 18.145,6.575 18.605,7.035 RcS.2
  Top Layer w0.5: RcS.2 19.005,7.035 RcS.2@19.345,7.375 ; Cbus.1@19.345,8.645 19.715,9.015 Cbus.1
  Top Layer w0.9: RcS.2@19.345,7.375 Cbus.1@19.345,8.645 ; Cbus.1 20.74,9.255 33.33,9.255 34.75,10.675 J_USB.1
V_Solar: Ce1.1 J_Solar.1 U5.1 U5.5 | length 10.8
  Top Layer w0.381: U5.5 50.475,5.365 50.957,5.365 51.588,4.735 52.525,4.735 U5.1
  Top Layer w0.6: 54.7,7 55.3,7.6 J_Solar.1@55.3,10.641 ; Ce1.1@57.415,9.33 Ce1.1@57.415,9.345
  Top Layer w0.7: U5.1 53.575,4.575 54.45,5.45 54.45,5.678 54.7,5.928 54.7,7 ; 57.03,9.33 Ce1.1@57.415,9.33
WP_MEM: U1.19 U2.3 | length 7.1
  Top Layer w0.25: U1.19 36.861,18.65 37.134,18.923 37.134,19.283 37.675,19.823 38.758,19.823 U2.3 U2.3@38.176,19.965
XTAL_IN: Cy1.1 U1.28 Y.1 | length 9.9
  Top Layer w0.285: Y.1@24.614,21.515 24.881,21.515 25.4,22.034 25.4,23.312 25.958,23.87 Cy1.1@26.4,23.87 ; Cy1.1@26.342,23.8 26.584,24.043 30.116,24.043 31.05,23.109 U1.28
XTAL_OUT: Cy2.1 U1.27 Y.3 | length 13.3
  Top Layer w0.285: Y.3@22.914,23.715 22.914,23.74 22.914,23.775 23.779,24.64 30.91,24.64 31.55,24 U1.27
  Top Layer w0.3: Cy2.1@21.226,23.995 Cy2.1@21.286,24.055 ; Cy2.1@21.3,24.055 21.325,24.08 22.574,24.08 Y.3@22.914,23.74
pads on no net: Antenna.2 Antenna.3 Antenna.4 RdT.1 RqT.1 U1.5 U1.24 U7.5

## Polygon pours and split planes (outlines as drawn)
GND on Top Layer "PlanoDeMasa_Top" (solid, pour order 50): 0.125,23.425 1.6,24.9 7.716,24.9 7.726,18.925 17.973,18.925 17.973,24.9 60.9,24.9 62.4,23.4 62.4,1.625 60.925,0.15 48.6,0.15 48.6,4.45 13.95,4.45 13.95,0.15 1.625,0.15 0.125,1.65
BST2 on Top Layer "BST2Plane" (solid, pour order 30): 47.85,10.675 53.25,10.675 53.25,6.25 53.185,6.315 51.325,6.315 51.325,9.015 51.31,9 49,9 49,9.75 48.85,9.9 47.835,9.9
V_Solar on Top Layer "V_solar_Plane" (solid, pour order 34): 55,6.75 56.25,8 58.5,8 58.5,11.5 54.8,11.5 54.3,11 54.3,6.75
GND on Bottom Layer "PlanoDeMasa_Bottom" (solid, pour order 52): 0.125,23.425 1.6,24.9 7.716,24.9 7.726,18.925 17.973,18.925 17.973,24.9 60.9,24.9 62.4,23.4 62.4,1.625 60.925,0.15 48.6,0.15 48.6,4.45 13.95,4.45 13.95,0.15 1.625,0.15 0.125,1.65

## Silkscreen, mask and mechanical layers (free items; w line width, h text height)
Top Overlay:
  circle w0.09: c21.35,7.525 r0.502
  text "Brillo LED" at 61.8,17.1 h0.4 r270
  text "SUMMITS7 1.3Beta" at 5.275,16.5 h0.62
  text "Box Synergy" at 5.25,15.525 h0.6
  text "S7-1.3b" at 36.95,15.35 h0.8
  text "Ganancia Fotodiodo" at 1.25,8.3 h0.35
  text "5V" at 21.125,6.55 h0.3
Top Solder:
  pour cut-out: 7.788,18.962
  region: 7.775,25 17.975,25 17.975,18.925 7.775,18.925
Bottom Solder:
  region: 28.648,21.388 33,21.388 33,17.4 28.648,17.4
Board Outline:
  lines w0.1: 0,23.45 1.55,25 60.95,25 62.5,23.45 62.5,1.55 60.95,0 48.425,0 48.425,4.325 14.075,4.325 14.075,0 1.55,0 0,1.55 0,23.45 ; 0,23.45 0,23.45
Top Assembly:
  text "Assembly TOP (Summits7-b1.0)" at 0.65,19.3 h0.65
Bottom Assembly:
  text "Assembly BOTTOM (Summits7-b1.0)" at 56.35,7.65 h0.65

## Text inside footprints (layer, text, board x,y; h text height)
J_Jumper: Top Overlay "Jumper" at 43.05,13.46 h0.34 r270
J_Solar: Top Overlay "SolarPanel" at 56.6,12.375 h0.38; Top Overlay "+" at 55.25,8.625 h1.02 r270; Top Overlay "-" at 55.15,14.925 h1.02 r270
J_UART: Top Overlay "UART" at 53.567,18.762 h0.41 r270; Top Overlay "3V3" at 53.186,16.711 h0.3 r180; Top Overlay "Tx" at 51.789,16.711 h0.3 r180; Top Overlay "Rx" at 50.519,16.711 h0.3 r180; Top Overlay "GND" at 49.376,16.711 h0.3 r180